# Altium PCB Gastroscopy-Tool-Sensor.PcbDoc
Units mm, origin at the board's own origin, x right, y up, seen from the top; angles counter-clockwise.
Board outline 14.8 x 14.8 mm, 4 copper layers (Top Layer, Layer 2 (GND), Layer 3 (PWR), Bottom Layer), stack 1.49 mm thick; 23 components, 13 nets, 52 pads, 15 vias.
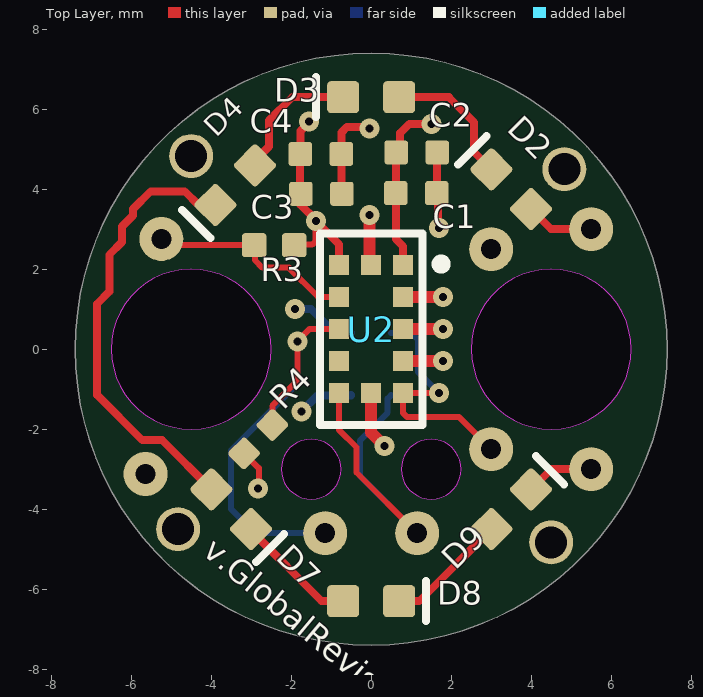
[diagram p0: Top Layer view]
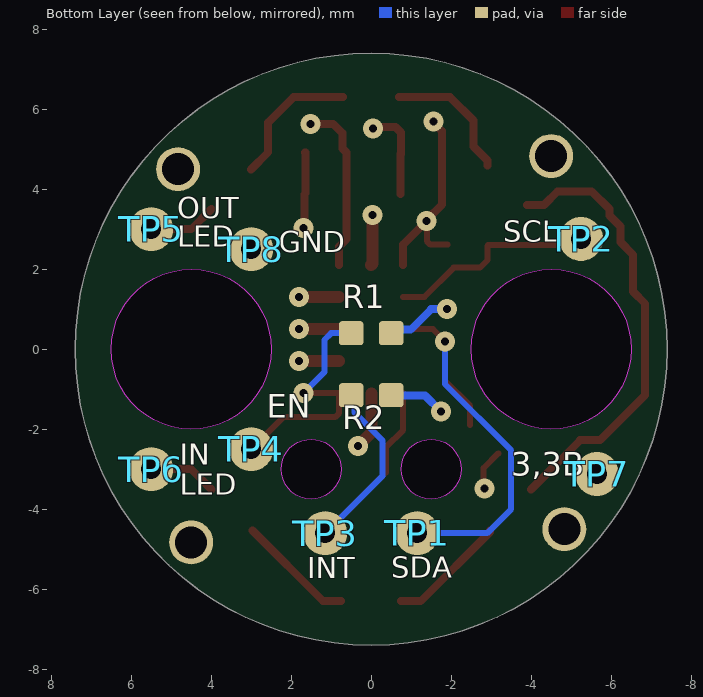
[diagram p1: Bottom Layer view, seen from below]
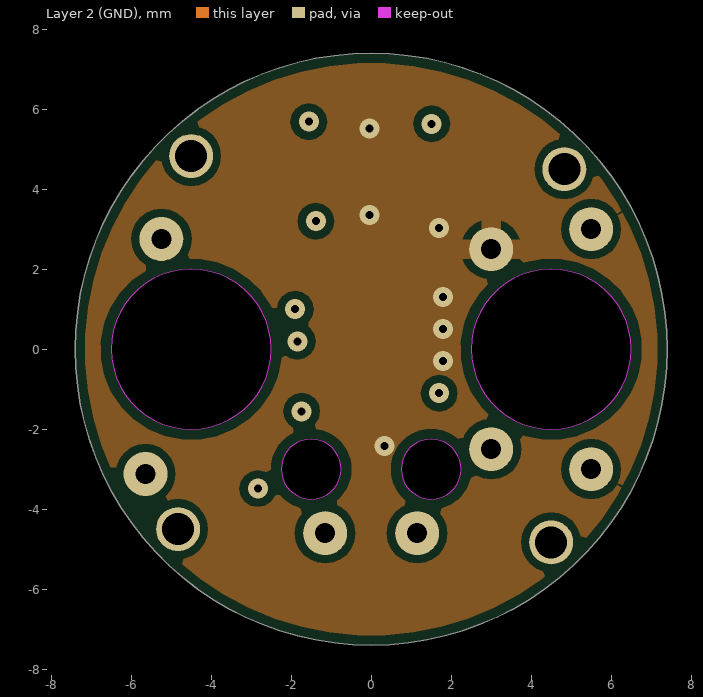
[diagram p2: Layer 2 (GND)]
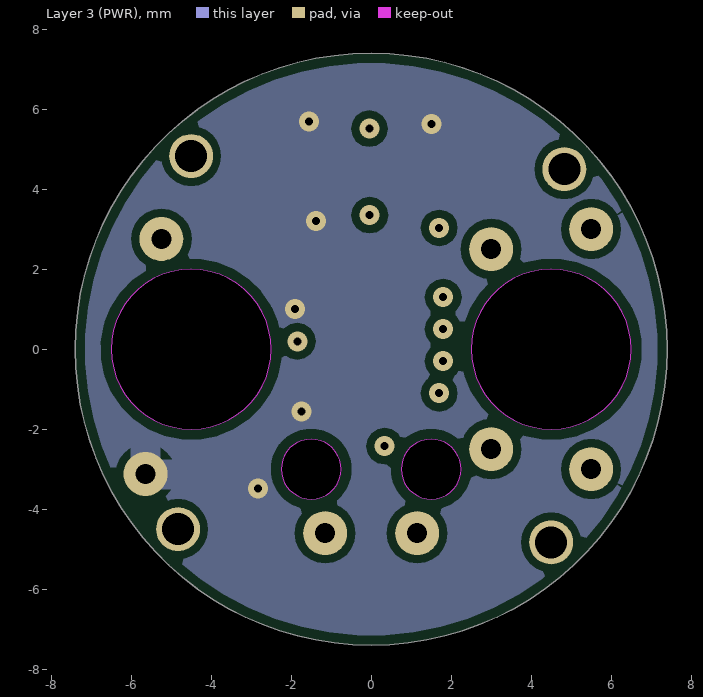
[diagram p3: Layer 3 (PWR)]
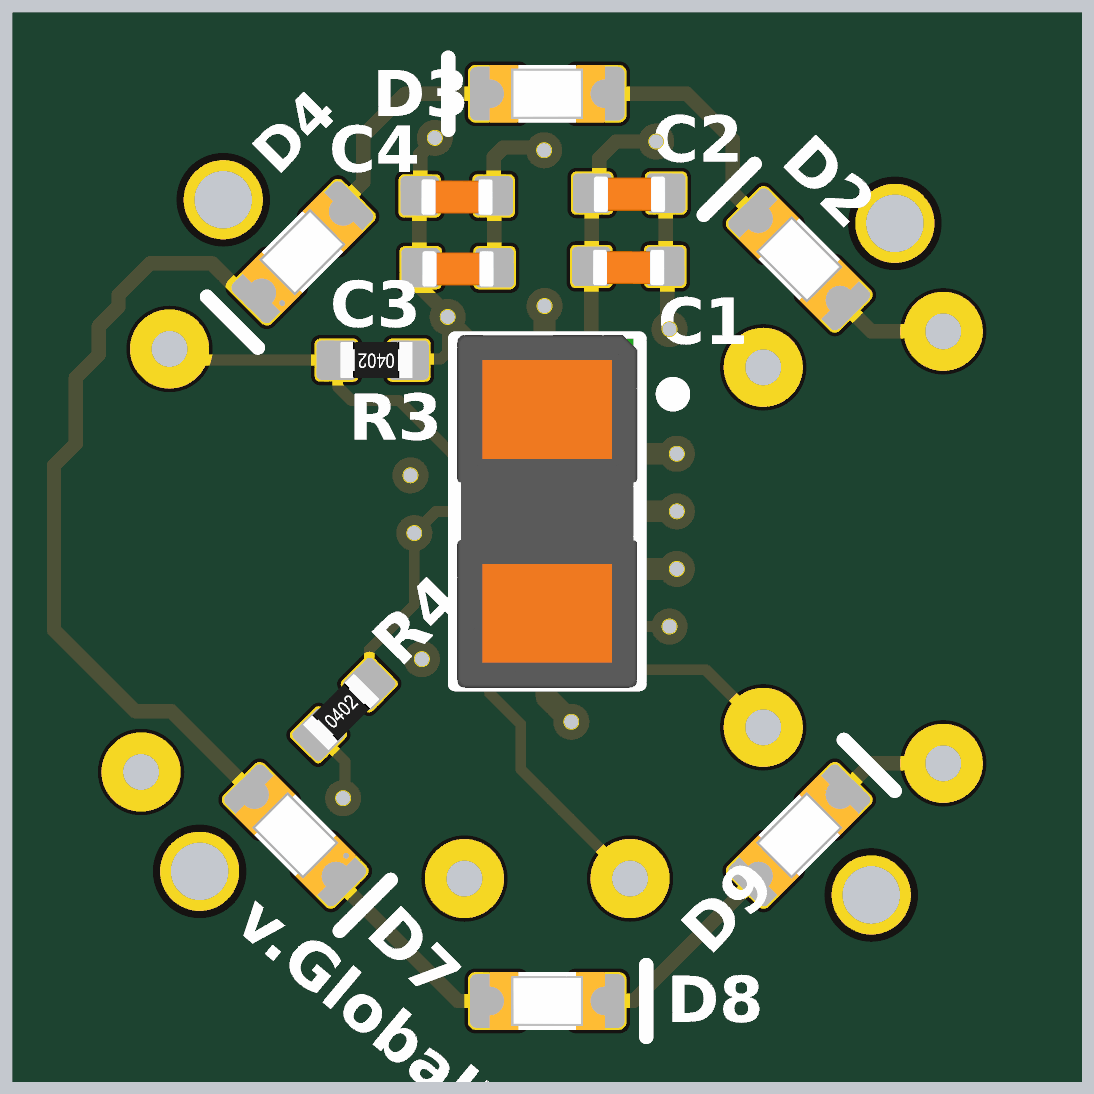
[diagram p4: 3D render of the assembled board from above, using the file's embedded part models]

## Layer stack, top to bottom
Top Solder: solder mask 0.0127, Dk 4
Top Layer: signal copper 0.018
Prepreg 1: prepreg 0.127, Dk 4.2
Layer 2 (GND): signal copper 0.018
Core 2: core 1.164, Dk 4.2
Layer 3 (PWR): signal copper 0.018
Prepreg 4: prepreg 0.127, Dk 4.2
Bottom Layer: signal copper 0.018
Bottom Solder: solder mask 0.0127, Dk 4

## Board outline
0,-7.4 cw(c0,0) -7.4,0 cw(c0,0) 0,7.4 cw(c0,0) 7.4,0 cw(c0,0)
cut-out: -6.5,0 ccw(c-4.5,0) -4.495,-2 ccw(c-4.5,0) -2.5,0 ccw(c-4.5,0) -4.5,2 -4.505,2 ccw(c-4.505,0.005)
cut-out: 2.5,0 ccw(c4.5,0) 4.505,-2 ccw(c4.5,0) 6.5,0 ccw(c4.5,0) 4.5,2 4.495,2 ccw(c4.495,0.005)
cut-out: 0.75,-3 ccw(c1.5,-3) 1.5,-3.75 ccw(c1.5,-3) 2.25,-3 ccw(c1.5,-3) 1.5,-2.25 ccw(c1.5,-3)
cut-out: -2.25,-3 ccw(c-1.5,-3) -1.5,-3.75 ccw(c-1.5,-3) -0.75,-3 ccw(c-1.5,-3) -1.5,-2.25 ccw(c-1.5,-3)

## Design rules (kind name [scope] priority, off if disabled: settings)
AcuteAngle [All] p1: minimum=3.50000000000000E+0001 checktracksonly=FALSE
BoardOutlineClearance [All] p1: gap=0.25 ignorepadtopadclearanceinfootprint=FALSE except(0: Arc-SplitContinuation Track-SplitContinuation SMDPad-SplitContinuation THPad-SplitContinuation Via-SplitContinuation Fill-SplitContinuation Poly-SplitContinuation Region-SplitContinuation Text-SplitContinuation) // Milling
Clearance Clearance-18_S [All] p1: gap=0.125 ignorepadtopadclearanceinfootprint=FALSE except(0.2: Arc-Fill Arc-Poly Track-Fill Track-Poly SMDPad-SMDPad SMDPad-Fill SMDPad-Poly THPad-Fill THPad-Poly Via-Fill Via-Poly Fill-Fill Fill-Poly Poly-Poly Poly-Region Poly-Text; 0.25: Arc-Hole Track-Hole SMDPad-Hole THPad-Hole Via-Hole Fill-Hole Poly-Hole Region-Hole Text-Hole) // Standart
ComponentClearance [All] p1: gap=0.5 collisioncheckmode=3 verticalgap=0.25 showdistances=FALSE
DiffPairsRouting "DiffPairsRouting 18" [All] p1: maxlimit=0.254 minlimit=0.1 mostfreqgap=0.25 toplayer_minwidth=0.1 toplayer_maxwidth=0.381 toplayer_prefwidth=0.35 midlayer3_minwidth=0.1 midlayer3_maxwidth=0.381 midlayer3_prefwidth=0.35 midlayer4_minwidth=0.1 midlayer4_maxwidth=0.381 midlayer4_prefwidth=0.35 bottomlayer_minwidth=0.1 bottomlayer_maxwidth=0.381 bottomlayer_prefwidth=0.35 maxuncoupledlength=12.7
HoleSize "Minimum HoleSize" [IsPad] p1: absolutevalues=TRUE maxlimit=5.9 minlimit=0.2 maxpercent=80.000 minpercent=20.000
HoleSize "Minimum HoleSize VIA" [IsVia] p2: absolutevalues=TRUE maxlimit=5.9 minlimit=0.2 maxpercent=80.000 minpercent=20.000 // Standart
HoleToHoleClearance Hole2HoleClearance [All] p1: gap=0.25 allowstackedmicrovias=FALSE
MinimumAnnularRing "Minimum AR VIA Standart" [IsVia] p1: minimumring=0.15
MinimumAnnularRing "Minimum AR PAD Standart" [IsPad] p2: minimumring=0.15
MinimumSolderMaskSliver "SolderMask Bridge Standart" [All] p1: minsoldermaskwidth=0.15 // All Masks
PasteMaskExpansion [All] p1: expansion=-0.025
PlaneClearance PlaneClearance-18_S [All] p1: clearance=0.2 // Standart
PlaneConnect TermalConnect-18_S [All] p1: planeconnectstyle=Relief reliefexpansion=0.2 reliefentries=4 reliefconductorwidth=0.2 reliefairgap=0.2 // Standart
PolygonConnect PolygonConnect_VIA [IsVia] p1: connectstyle=Direct reliefconductorwidth=0.254 reliefentries=4 polygonreliefangle="90 Angle" airgapwidth=0.254
PolygonConnect PolygonConnect-3V3 [InNet('3V3')] p2: connectstyle=Relief reliefconductorwidth=0.75 reliefentries=4 polygonreliefangle="90 Angle" airgapwidth=0.2 // Standart
PolygonConnect PolygonConnect-GND [InNet('GND')] p3: connectstyle=Relief reliefconductorwidth=0.5 reliefentries=4 polygonreliefangle="90 Angle" airgapwidth=0.2 // Standart
PolygonConnect PolygonConnect-TP [HasFootprint('TEST_POINT_SMT')] p4: connectstyle=Relief reliefconductorwidth=0.5 reliefentries=4 polygonreliefangle="90 Angle" airgapwidth=0.2 // Standart
PolygonConnect PolygonConnect-18_S [All] p5: thpad.connectstyle=Relief thpad.reliefconductorwidth=0.15 thpad.reliefentries=4 thpad.polygonreliefangle="90 Angle" thpad.airgapwidth=0.2 smdpad.connectstyle=Relief smdpad.reliefconductorwidth=0.2 smdpad.reliefentries=4 smdpad.polygonreliefangle="90 Angle" smdpad.airgapwidth=0.2 via.connectstyle=Direct via.reliefconductorwidth=0.254 via.reliefentries=4 via.polygonreliefangle="90 Angle" via.airgapwidth=0.254 // Standart
RoutingCorners [All] p1 off: cornerstyle=45-Degree minsetback=3 maxsetback=3
RoutingVias RoutingVias_S [All] p1: holewidth=0.3 width=0.45 viastyle="Through Hole" minholewidth=0.3 minwidth=0.45 maxholewidth=5.9 maxwidth=6.4 // Standart
SilkToSilkClearance [All] p1: silktosilkclearance=0.1
SilkToSolderMaskClearance [IsPad] p1: minsilkscreentomaskgap=0.1 clearancetoexposedcopper=TRUE
SolderMaskExpansion SolderMaskExpansion-1 [All] p1: expansion=0.05 istentingtop=FALSE // Standart
UnRoutedNet [All] p1: checkbadconnections=TRUE
Width Width-18_S [All] p1: maxlimit=10 minlimit=0.125 preferedwidth=0.2 checkconnectedcopper=TRUE
18 further rules are at their usual default settings.

## Classes and differential pairs
component class "TOF Sensor": C1 C2 C3 C4 R1 R2 R3 R4 U2
component class "LED Driver": D2 D3 D4 D7 D8 D9
component class Connectors: TP1 TP2 TP3 TP4 TP5 TP6 TP7 TP8

## Components (designator, comment, footprint, x,y, rotation, side; value= is the part's Value field where it differs from the comment)
C1 "100nF" CAP_0402 1.139,3.882 r180 top
C2 "100nF" CAP_0402 1.15,4.9 r180 top
C3 "2.2uF" CAP_0402 -1.232,3.864 r180 top
C4 "2.2uF" CAP_0402 -1.245,4.861 r180 top
D2 "GNL-0603UWC" L_0603_WHITE 3.5,4 r135 top
D3 "GNL-0603UWC" L_0603_WHITE 0,6.3 r180 top (schematic designator D4)
D4 "GNL-0603UWC" L_0603_WHITE -3.4,4.1 r225 top (schematic designator D6)
D7 "GNL-0603UWC" L_0603_WHITE -3.5,-4 r315 top (schematic designator D3)
D8 "GNL-0603UWC" L_0603_WHITE 0,-6.3 r0 top (schematic designator D5)
D9 "GNL-0603UWC" L_0603_WHITE 3.5,-4 r45 top (schematic designator D7)
R1 "10kR" RES_0402 0,0.4 r0 bottom
R2 "10kR" RES_0402 0,-1.15 r0 bottom
R3 "2.2kR" RES_0402 -2.425,2.6 r180 top
R4 "2.2kR" RES_0402 -2.825,-2.25 r45 top
TP1 "TEST_POINT_SMT" TEST_POINT_TH -1.15,-4.6 r90 bottom
TP2 "TEST_POINT_SMT" TEST_POINT_TH -5.246,2.756 r90 bottom
TP3 "TEST_POINT_SMT" TEST_POINT_TH 1.15,-4.6 r90 bottom
TP4 "TEST_POINT_SMT" TEST_POINT_TH 3,-2.5 r90 bottom
TP5 "TEST_POINT_SMT" TEST_POINT_TH 5.5,3 r180 bottom
TP6 "TEST_POINT_SMT" TEST_POINT_TH 5.5,-3 r90 bottom
TP7 "TEST_POINT_SMT" TEST_POINT_TH -5.641,-3.12 r90 bottom
TP8 "TEST_POINT_SMT" TEST_POINT_TH 3,2.5 r90 bottom
U2 "VL53L1CXV0FY/1" VL53L1CXV0FY/1 0,0.5 r0 top (schematic designator U1)

## Footprints (in the part's own frame and the unit in brackets; to place one, negate y for a bottom-side part, rotate by r counter-clockwise, add the part's x,y. Pads: shape width x height; smd on the part's side, far side on the other; paste and mask are expansions set on the pad)
CAP_0402 [mm]
  rrect25% 0.59x0.6 smd: 1(-0.5,-0.02) 2(0.525,-0.02)
  body extent -0.49,-0.25 0.51,0.25, height 0.48
L_0603_WHITE [mm]
  rrect25% 0.8x0.8 smd: 1(-0.7,0) 2(0.7,0)
  silkscreen extent 1.38,-0.5 1.38,0.5, body extent -0.8,-0.4 0.8,0.4, height 0.6
RES_0402 [mm]
  rrect25% 0.61x0.6 smd: 1(-0.5,0) 2(0.5,0)
  body extent -0.55,-0.25 0.45,0.25, height 0.35
TEST_POINT_TH [mm] "TH test point, 100 mil pad, 60 mil hole"
  round 1.1 hole 0.5: 1(0,0)
VL53L1CXV0FY/1 [mm]
  rect 0.5x0.5 smd mask+0.06: 1(0.8,1.6) 2(0.8,0.8) 3(0.8,0) 4(0.8,-0.8) 5(0.8,-1.6) 6(0,-1.6) 7(-0.8,-1.6) 8(-0.8,-0.8) 9(-0.8,0) 10(-0.8,0.8) 11(-0.8,1.6) 12(0,1.6)
  silkscreen extent -1.28,-2.4 1.87,2.4, body extent -1.25,-2.45 1.25,2.45, height 1.6

## Part data
C1 C2: library part CC0402JRX7R8BB104, "CAP CER 0.1UF 25V X7R 0402", Case/Package=0402, Dielectric=X7R, Manufacturer=Yageo, Supplier Part Number 1=603-CC0402JR7R8BB104, Tolerance=5%, Voltage Rating (DC)=25V, Capacitance=100nF, Category="Ceramic Capacitors", Halogen Free="Halogen Free", Lead Free="Lead Free", Manufacturer Part Number=CC0402JRX7R8BB104, Pricing 1="1=0,10000, 10=0,03800, 50=0,03800, 100=0,03000, 1000=0,01700, 10000=0,01200 (USD)", RoHS=Yes, Stock 1=20266, Supplier 1=Mouser
C3 C4: library part GRM155Z71A225KE44D, "CAP CER 2.2UF 10V X7R 0402", Case/Package=0402, Manufacturer=Murata, Voltage - Rated=10V, Capacitance=2.2uF, Category="Ceramic Capacitors", Manufacturer Part Number=GRM155Z71A225KE44D, Pricing 1="10000=0,02300, 20000=0,02230, 30000=0,02180, 50000=0,02160, 100000=0,02130 (USD)", RoHS=Yes, RoHS Compliant=Yes, Stock 1=100000, Supplier 1="Arrow Electronics", Supplier Part Number 1=GRM155Z71A225KE44D
D2 D3 D4 D7 D8 D9: "LED WHITE CLEAR SMD", Manufacturer 1="G-nor Electronics", Manufacturer Part Number 1=GNL-0603UWC
R1 R2: library part RC0402FR-0710KL, "RES 10K OHM 1% 1/16W 0402", Case Code (Imperial)=0402, Case Code (Metric)=1005, Manufacturer=Yageo, Max Operating Temperature=155°C, Max Power Dissipation=63mW, Min Operating Temperature=-55°C, Power Rating=62.5mW, Resistance Tolerance=1%, Resistor Type="Thick Film", Supplier Part Number 1=1987644P, Temperature Coefficient=100ppm/°C, Voltage Rating=50V, Case/Package=0402, Category="Chip SMD Resistors", ComponentLink1Description=https://datasheet.ciiva.com/7660/38568-7660787.pdf?src-supplier=Element14, ComponentLink1URL=https://datasheet.ciiva.com/7660/38568-7660787.pdf?src-supplier=Element14, ComponentLink2Description=https://datasheet.ciiva.com/7849/1686128-7849814.pdf?src-supplier=Element14, ComponentLink2URL=https://datasheet.ciiva.com/7849/1686128-7849814.pdf?src-supplier=Element14, ComponentLink3Description=https://datasheet.ciiva.com/7983/1018594-7983486.pdf?src-supplier=Element14, ComponentLink3URL=https://datasheet.ciiva.com/7983/1018594-7983486.pdf?src-supplier=Element14, ComponentLink4Description=https://datasheet.ciiva.com/22747/1018594-22747512.pdf?src-supplier=Element14, ComponentLink4URL=https://datasheet.ciiva.com/22747/1018594-22747512.pdf?src-supplier=Element14, ComponentLink5Description=https://datasheet.ciiva.com/12667/pyu-rc0402-51-rohs-l-6-r-12667067.pdf?src-supplier=Mouser, ComponentLink5URL=https://datasheet.ciiva.com/12667/pyu-rc0402-51-rohs-l-6-r-12667067.pdf?src-supplier=Mouser, ComponentLink6Description=https://datasheet.ciiva.com/7849/1784430-7849813.pdf?src-supplier=Element14, ComponentLink6URL=https://datasheet.ciiva.com/7849/1784430-7849813.pdf?src-supplier=Element14, ComponentLink7Description=https://datasheet.ciiva.com/7849/1784430-7849815.pdf?src-supplier=Element14, ComponentLink7URL=https://datasheet.ciiva.com/7849/1784430-7849815.pdf?src-supplier=Element14, Construction=Rectangular, Depth=0.5mm, Features="Moisture Resistant", Height=0.32mm, Lead Free="Lead Free", Lead Pitch=0.2mm, Length=1mm, Manufacturer Part Number=RC0402FR-0710KL, Military Standard=Not, Number of pins=2, Number of Terminations=2, Packaging="Tape and Reel", Pricing 1="1000=0,00500, 2500=0,00400, 5000=0,00400, 10000=0,00400 (GBP)", Resistance=10kR, RoHS=Yes, RoHS Compliant=Yes, Series=RC, Stock 1=279800, Supplier 1=RSComponents, Termination=SMD/SMT, Tolerance=1%, Voltage Rating (DC)=50V, Width=0.5mm, Working Voltage=50V
R3 R4: library part RC0402FR-072K2L, "RES 2.2K OHM 1% 1/16W 0402", Case Code (Imperial)=0402, Case Code (Metric)=1005, Manufacturer=Yageo, Max Operating Temperature=155°C, Max Power Dissipation=63mW, Min Operating Temperature=-55°C, Power Rating=62.5mW, Resistance Tolerance=1%, Resistor Type="Thick Film", Supplier Part Number 1=1987731, Temperature Coefficient=100ppm/°C, Voltage Rating=50V, Case/Package=0402, Category="Chip SMD Resistors", ComponentLink1Description=https://datasheet.ciiva.com/11808/0900766b80c66297-11808786.pdf?src-supplier=RSComponents, ComponentLink1URL=https://datasheet.ciiva.com/11808/0900766b80c66297-11808786.pdf?src-supplier=RSComponents, ComponentLink2Description=https://datasheet.ciiva.com/7983/1018594-7983515.pdf?src-supplier=Element14, ComponentLink2URL=https://datasheet.ciiva.com/7983/1018594-7983515.pdf?src-supplier=Element14, ComponentLink3Description=https://datasheet.ciiva.com/46383/1018594-46383563.pdf?src-supplier=Element14, ComponentLink3URL=https://datasheet.ciiva.com/46383/1018594-46383563.pdf?src-supplier=Element14, ComponentLink4Description=https://datasheet.ciiva.com/12577/pyu-rc0402-51-rohs-l-6-r-12577429.pdf?src-supplier=Mouser, ComponentLink4URL=https://datasheet.ciiva.com/12577/pyu-rc0402-51-rohs-l-6-r-12577429.pdf?src-supplier=Mouser, ComponentLink5Description=https://datasheet.ciiva.com/7849/1018594-7849929.pdf?src-supplier=Element14, ComponentLink5URL=https://datasheet.ciiva.com/7849/1018594-7849929.pdf?src-supplier=Element14, ComponentLink6Description=https://datasheet.ciiva.com/7849/1018594-7849928.pdf?src-supplier=Element14, ComponentLink6URL=https://datasheet.ciiva.com/7849/1018594-7849928.pdf?src-supplier=Element14, ComponentLink7Description=https://datasheet.ciiva.com/16741/pyu-rc0402-51-rohs-l-6-r-16741015.pdf?src-supplier=Future+Electronics, ComponentLink7URL=https://datasheet.ciiva.com/16741/pyu-rc0402-51-rohs-l-6-r-16741015.pdf?src-supplier=Future+Electronics, Construction=Rectangular, Depth=0.5mm, Features="Moisture Resistant", Height=0.35mm, Lead Free="Lead Free", Length=1mm, Manufacturer Part Number=RC0402FR-072K2L, Military Standard=Not, Number of Terminations=2, Packaging="Tape and Reel", Pricing 1="100=0,03500, 500=0,03300, 1000=0,03000, 2500=0,02700, 5000=0,02500 (GBP)", Reach SVHC Compliant=Yes, Resistance=2.2kR, RoHS=Yes, RoHS Compliant=Yes, Series=RC, Size Code=0402, Stock 1=12100, Supplier 1=RSComponents, Technology="THICK FILM", Termination=SMD/SMT, Tolerance=1%, Weight=2.3E-05oz, Width=0.5mm
TP1 TP2 TP3 TP4 TP5 TP6 TP7 TP8: "STM TEST POINT"
U2: "SENSOR OPTICAL 4M I2C", Manufacturer 1=STMicroelectronics, Max Operating Temperature=85°C, Min Operating Temperature=-20°C, Supplier Part Number 1=52AC7854, Category="Proximity Sensors", ComponentLink1Description=http://www.farnell.com/datasheets/2600105.pdf?src-supplier=Farnell, ComponentLink1URL=http://www.farnell.com/datasheets/2600105.pdf?src-supplier=Farnell, ComponentLink2Description=http://www.st.com/content/ccc/resource/technical/document/datasheet/group3/7d/85/c8/95/fb/3b/4e/2d/DM00452094/files/DM00452094.pdf/jcr:content/translations/en.DM00452094.pdf?src-supplier=Digi-Key, ComponentLink2URL=http://www.st.com/content/ccc/resource/technical/document/datasheet/group3/7d/85/c8/95/fb/3b/4e/2d/DM00452094/files/DM00452094.pdf/jcr:content/translations/en.DM00452094.pdf?src-supplier=Digi-Key, ComponentLink3Description=https://www.st.com/resource/en/datasheet/vl53l1x.pdf?src-supplier=Digi-Key, ComponentLink3URL=https://www.st.com/resource/en/datasheet/vl53l1x.pdf?src-supplier=Digi-Key, Manufacturer Part Number 1=VL53L1CXV0FY/1, Output Type=I2C, Pricing 1="1=7,70000, 10=7,03000, 25=6,73000, 50=6,33000, 100=5,94000, 250=5,71000 (USD)", RoHS=Yes, RoHS Compliant=Yes, Stock 1=143, Supplier 1=Avnet

## Free pads (board coordinates)
  round 1.1 hole 0.8 mask+0.1: ""(-4.828,-4.5) ""(-4.5,4.828) ""(4.5,-4.828) ""(4.828,4.5)

## Via types
v1: diameter 0.5, hole 0.2, Top Layer to Bottom Layer, tented both sides, 15 vias

## Nets (pads, with @x,y where several pads share a name; then routed paths per layer and width w, separated by ;. In a path a pad name is that pad's centre, name@x,y a point inside that pad or via, vN(x,y) a via of type N, cw(c..) or ccw(c..) an arc to the next point about the centre after c; other vN are vias at no path point)
3V3: C1.2 C2.2 C3.2 C4.2 R1.1 R2.1 R3.1 R4.1 TP7.1 U2.1 U2.11 | length 13.5
  Top Layer w0.125: R3.1 R3.1@-1.911,2.614
  Top Layer w0.15: R4.1 -2.807,-2.975 -2.807,-3.456 v1(-2.835,-3.484) ; R3.1@-1.911,2.614 -1.477,2.614 -1.389,2.702 v1@-1.389,3.194
  Top Layer w0.2: C3.2@-1.775,3.62 -1.383,3.228 v1(-1.383,3.2) -0.8,2.617 U2.11 ; C3.2@-1.775,3.689 -1.775,4.79 -1.766,4.799 -1.766,5.458 -1.561,5.663 v1(-1.561,5.687) ; U2.1 U2.1 0.801,2.571 0.614,2.758 C1.2 0.619,3.907 0.619,4.914 0.72,5.015 0.72,5.401 0.955,5.636 v1(1.513,5.636)
  Bottom Layer w0.2: v1(-1.9,1) -1.5,1 -0.988,0.488 -0.588,0.488 R1.1 ; v1(-1.741,-1.553) -1.345,-1.157 -0.507,-1.157 R2.1
GND: C1.1 C2.1 C3.1 C4.1 TP8.1 U2.2 U2.3 U2.4 U2.6 U2.12 | length 10
  Top Layer w0.2: C3.1 -0.738,3.89 -0.738,4.875 C4.1 -0.745,5.418 -0.609,5.554 -0.082,5.554 v1(-0.043,5.515) ; C2.1 1.644,4.914 1.644,3.907 C1.1 1.669,3.872 1.669,3.061 v1(1.699,3.031)
  Top Layer w0.3: v1(-0.038,3.352) -0.038,2.138 U2.12 ; U2.6@-0.01,-1.11 -0.01,-2.079 v1(0.334,-2.423) ; U2.4 v1(1.8,-0.3) ; U2.3 v1(1.8,0.5) ; U2.2 v1(1.8,1.3)
LED_IN: D9.2 TP6.1 | length 1.7
  Top Layer w0.2: D9.2 4.5,-3 TP6.1
LED_OUT: D2.1 TP5.1 | length 1.7
  Top Layer w0.2: D2.1 4.5,3 TP5.1
MCU_INT: R2.2 TP3.1 U2.7 | length 8.7
  Top Layer w0.15: U2.7 -0.8,-2.023 -0.367,-2.456 -0.367,-3.083 TP3.1
  Bottom Layer w0.15: R2.2 0.413,-1.237 0.413,-1.587 -0.286,-2.286 -0.286,-3.164 TP3.1
MCU_SCL: R3.2 TP2.1 U2.10 | length 5.3
  Top Layer w0.15: TP2.1 -5.091,2.6 R3.2 -2.911,2.586 -2.911,2.23 -2.72,2.039 -2.061,2.039 -1.328,1.306 -0.806,1.306 U2.10
MCU_SDA: R4.2 TP1.1 U2.9 | length 11
  Top Layer w0.15: R4.2 -2.468,-1.893 -2.468,-1.575 -2.471,-1.571 -2.471,-1.418 -1.846,-0.793 v1(-1.846,0.198) -1.544,0.5 U2.9
  Bottom Layer w0.15: v1@-1.846,0.186 -1.846,-0.875 -3.5,-2.529 -3.5,-4 -2.9,-4.6 TP1.1
NetD2_2: D2.2 D3.1 | length 3.5
  Top Layer w0.2: D3.1 1.941,6.3 2.575,5.666 2.575,4.925 D2.2
NetD3_2: D3.2 D4.1 | length 3.4
  Top Layer w0.2: D4.1 -2.905,4.717 -2.554,5.068 -2.554,5.718 -1.972,6.3 D3.2
NetD4_2: D4.2 D7.1 | length 11.2
  Top Layer w0.2: D7.1 -5.226,-2.274 -5.722,-2.274 -6.851,-1.146 -6.851,1.135 -6.547,1.439 -6.547,2.359 -6.229,2.677 -6.229,3.071 -5.955,3.345 -5.955,3.502 -5.509,3.947 -4.661,3.947 -4.319,3.605 D4.2
NetD7_2: D7.2 D8.1 | length 3
  Top Layer w0.2: D7.2@-2.97,-4.53 -2.97,-4.568 -1.238,-6.3 D8.1@-0.75,-6.3
NetD8_2: D8.2 D9.1 | length 3
  Top Layer w0.2: D8.2@0.75,-6.3 0.751,-6.299 1.201,-6.299 ; 1.174,-6.3 1.2,-6.3 1.201,-6.299 ; D9.1@2.97,-4.53 1.201,-6.299
TOF_EN: R1.2 TP4.1 U2.5 | length 6.3
  Top Layer w0.15: v1(1.698,-1.1) U2.5 0.8,-1.6 0.9,-1.7 2.2,-1.7 TP4.1
  Bottom Layer w0.15: R1.2 1.003,0.4 1.172,0.231 1.172,-0.574 v1(1.698,-1.1)
pads on no net: U2.8

## Polygon pours and split planes (outlines as drawn)
GND on Layer 2 (GND) "Layer 4 (GND)-GND" (solid, pour order 16): 0,7.4 cw(c0,0) 7.4,0 cw(c0,0) 0,-7.4 cw(c0,0) -7.4,0 cw(c0,0)
3V3 on Layer 3 (PWR) "Layer 4 (GND)-GND" (solid, pour order 4): 0,7.4 cw(c0,0) 7.4,0 cw(c0,0) 0,-7.4 cw(c0,0) -7.4,0 cw(c0,0)

## Silkscreen, mask and mechanical layers (free items; w line width, h text height)
Top Overlay:
  text "v.GlobalRevisionPCB" at -4.377,-5.265 h1 r320
Bottom Overlay:
  text "OUT" at 4.849,3.096 h0.9
  text "SCL" at -3.3,2.51 h0.9
  text "LED" at 4.849,2.386 h0.9
  text "GND" at 2.312,2.247 h0.9
  text "EN" at 2.607,-1.92 h1
  text "IN" at 4.784,-3.068 h0.9
  text "3,3В" at -3.5,-3.367 h1
  text "LED" at 4.784,-3.811 h0.9
  text "SDA" at -0.5,-5.89 h0.9
  text "INT" at 1.6,-5.9 h0.9
Board Outline:
  circle w0.013: c4.5,0 r2
  circle w0.013: c0,0 r7.4
  circle w0.013: c1.5,-3 r0.75
  circle w0.013: c-4.5,0 r2
  circle w0.013: c-1.5,-3 r0.75